# Altium PCB BatteryManagementSystem2.PcbDoc (part 1 of 2)
Units mil, origin at the board's own origin, x right, y up, seen from the top; angles counter-clockwise.
Board outline 5250 x 2500 mil, 4 copper layers (Top Layer, GND, 3V3, Bottom Layer); 230 components, 167 nets, 719 pads, 227 vias.
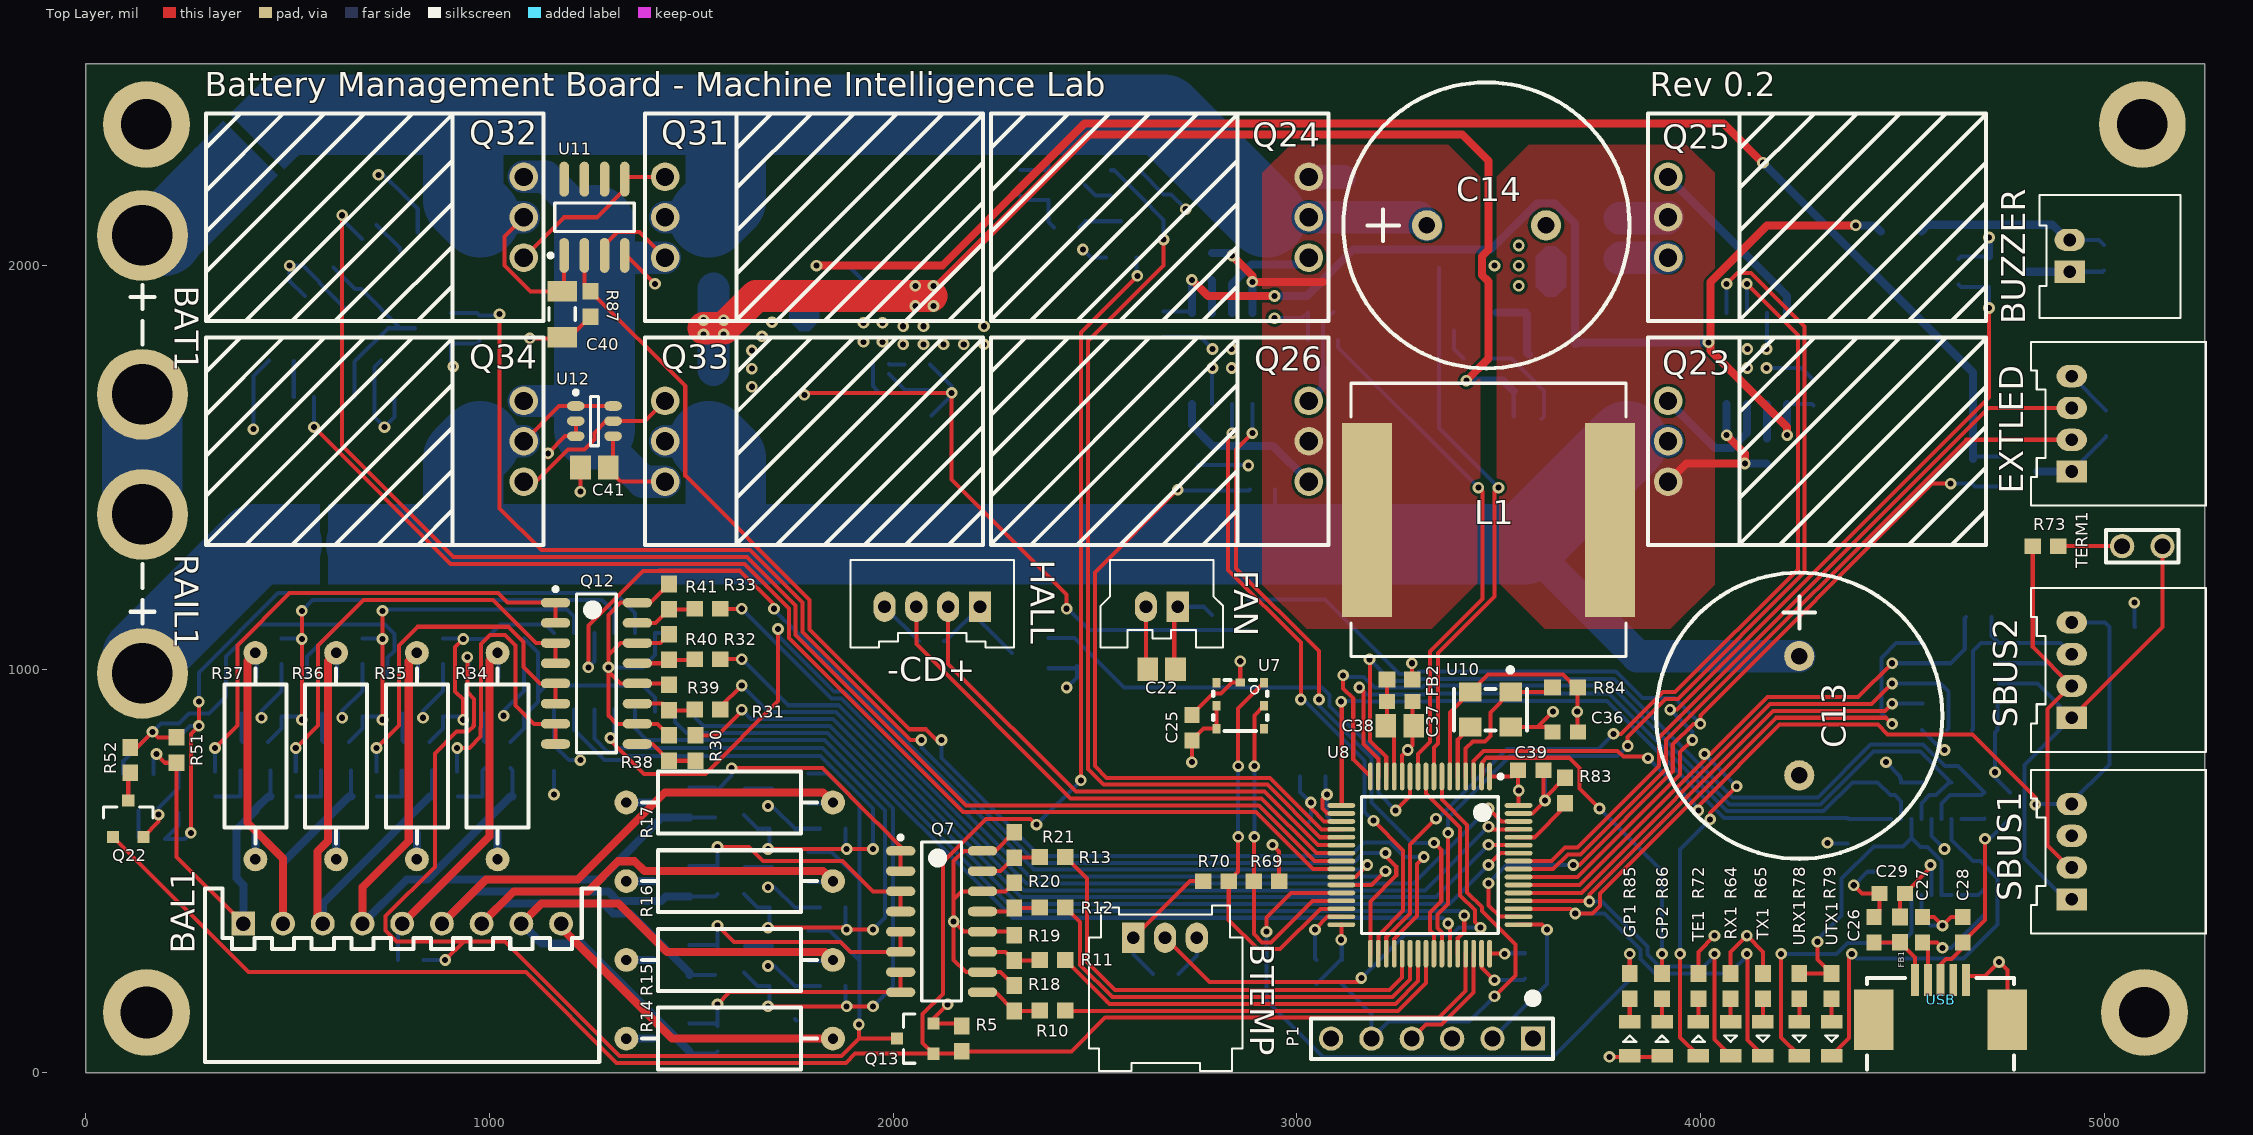
[diagram p0: Top Layer view]
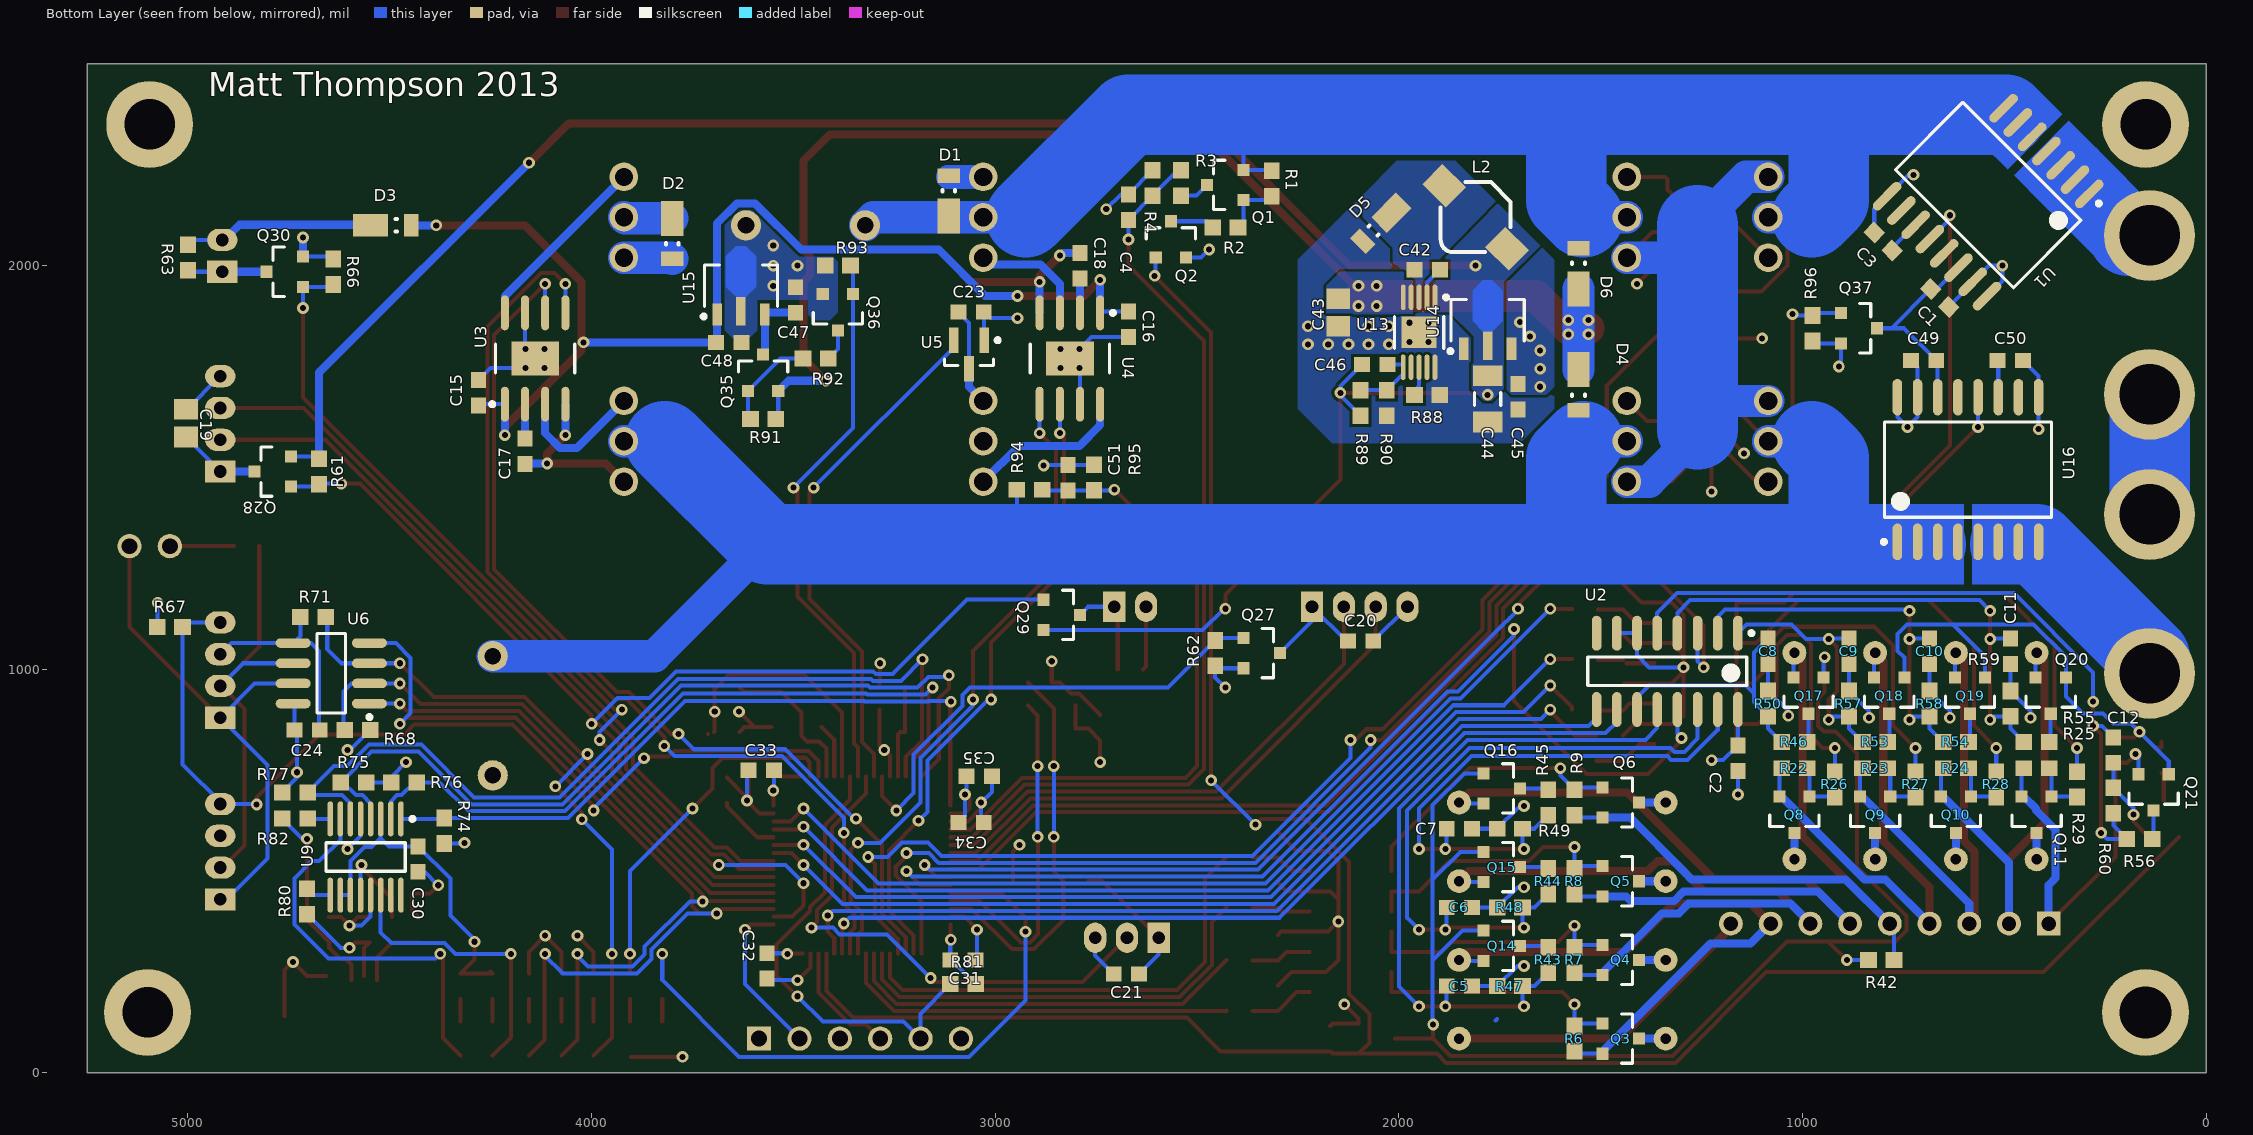
[diagram p1: Bottom Layer view, seen from below]
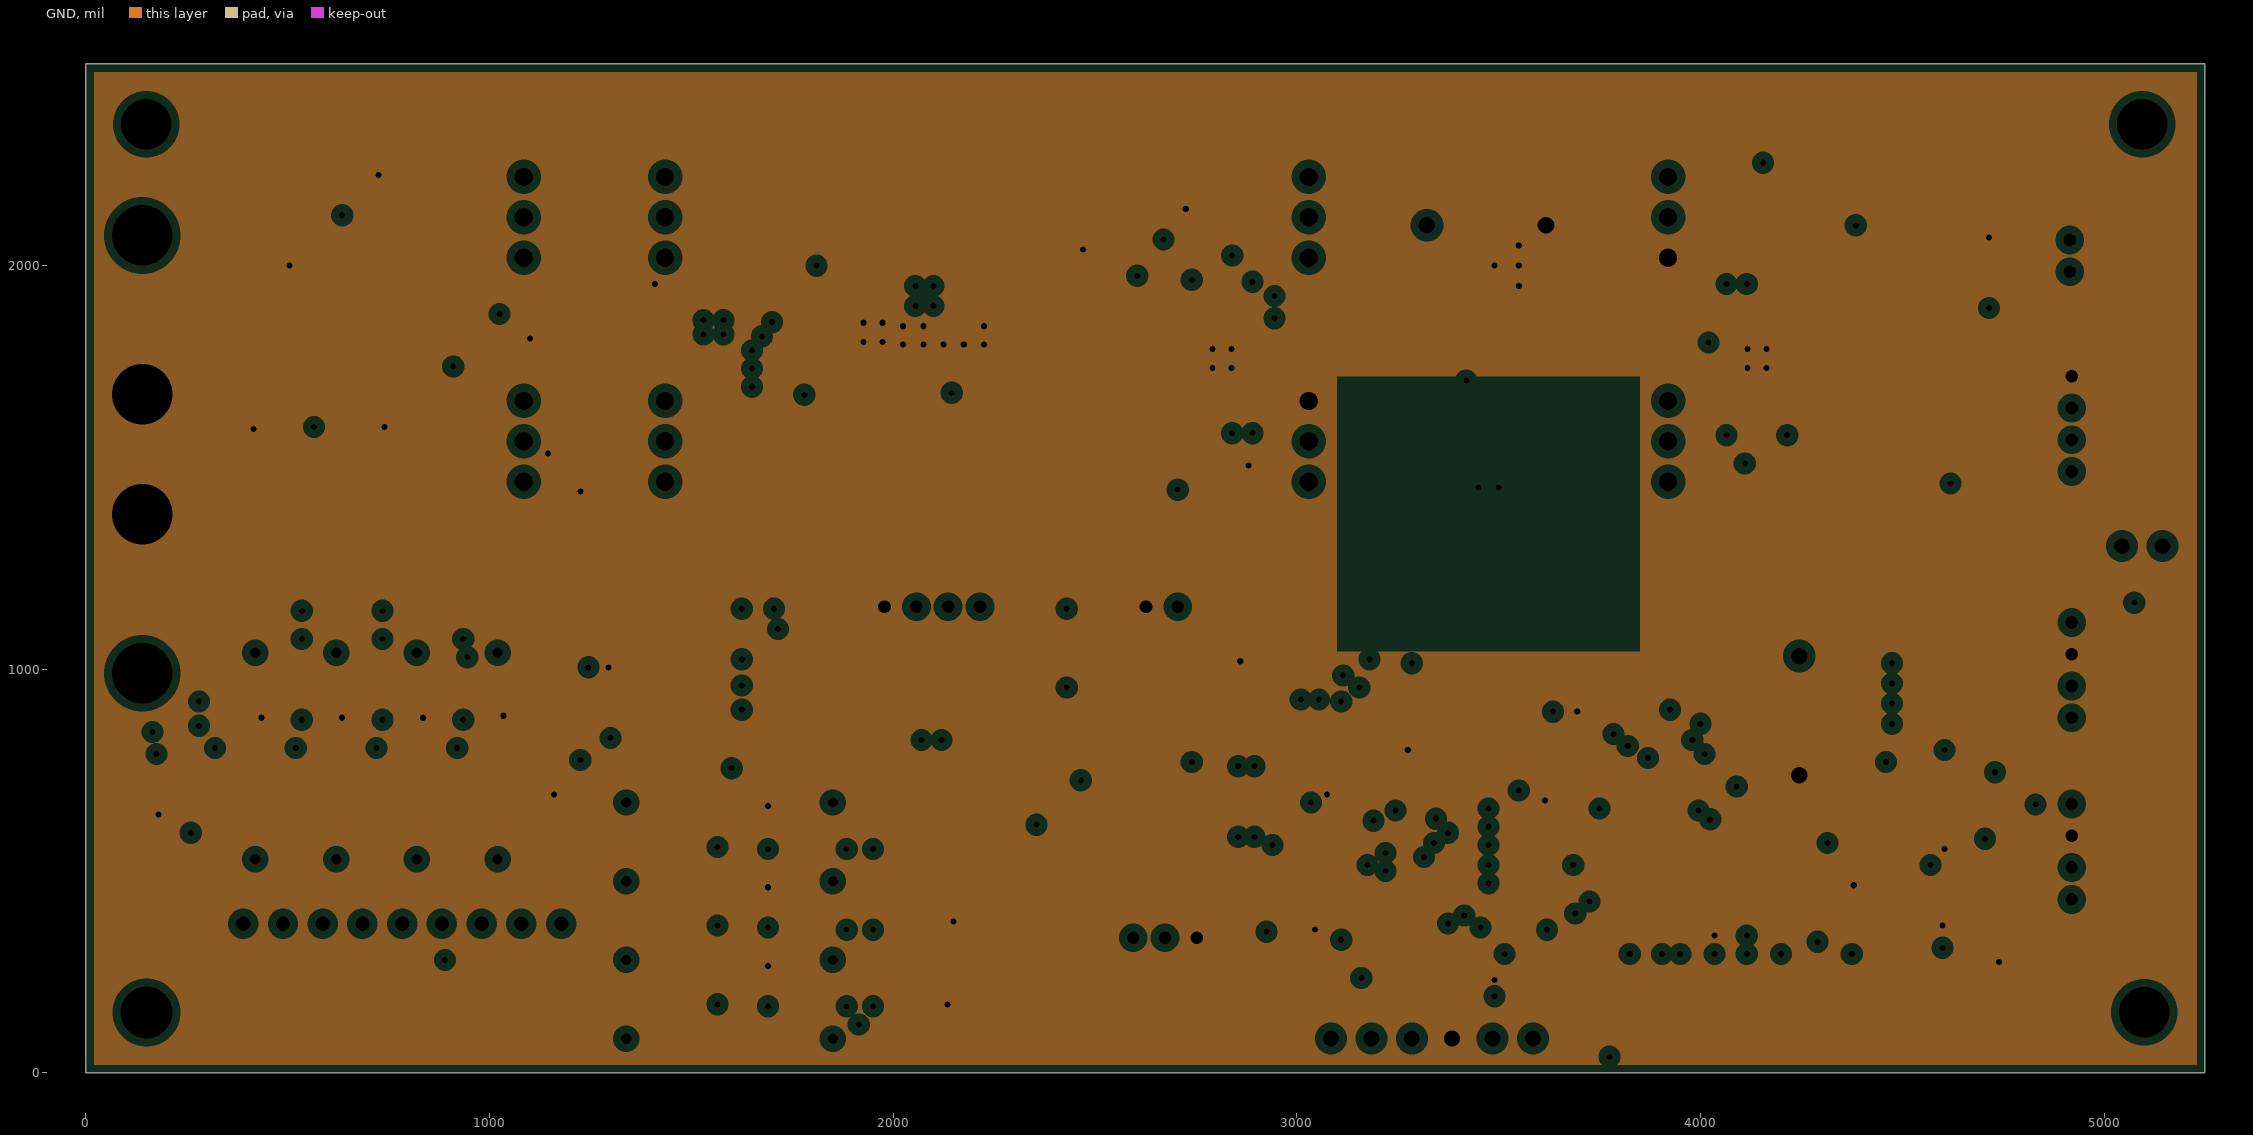
[diagram p2: GND, clearances drawn from the general rule]
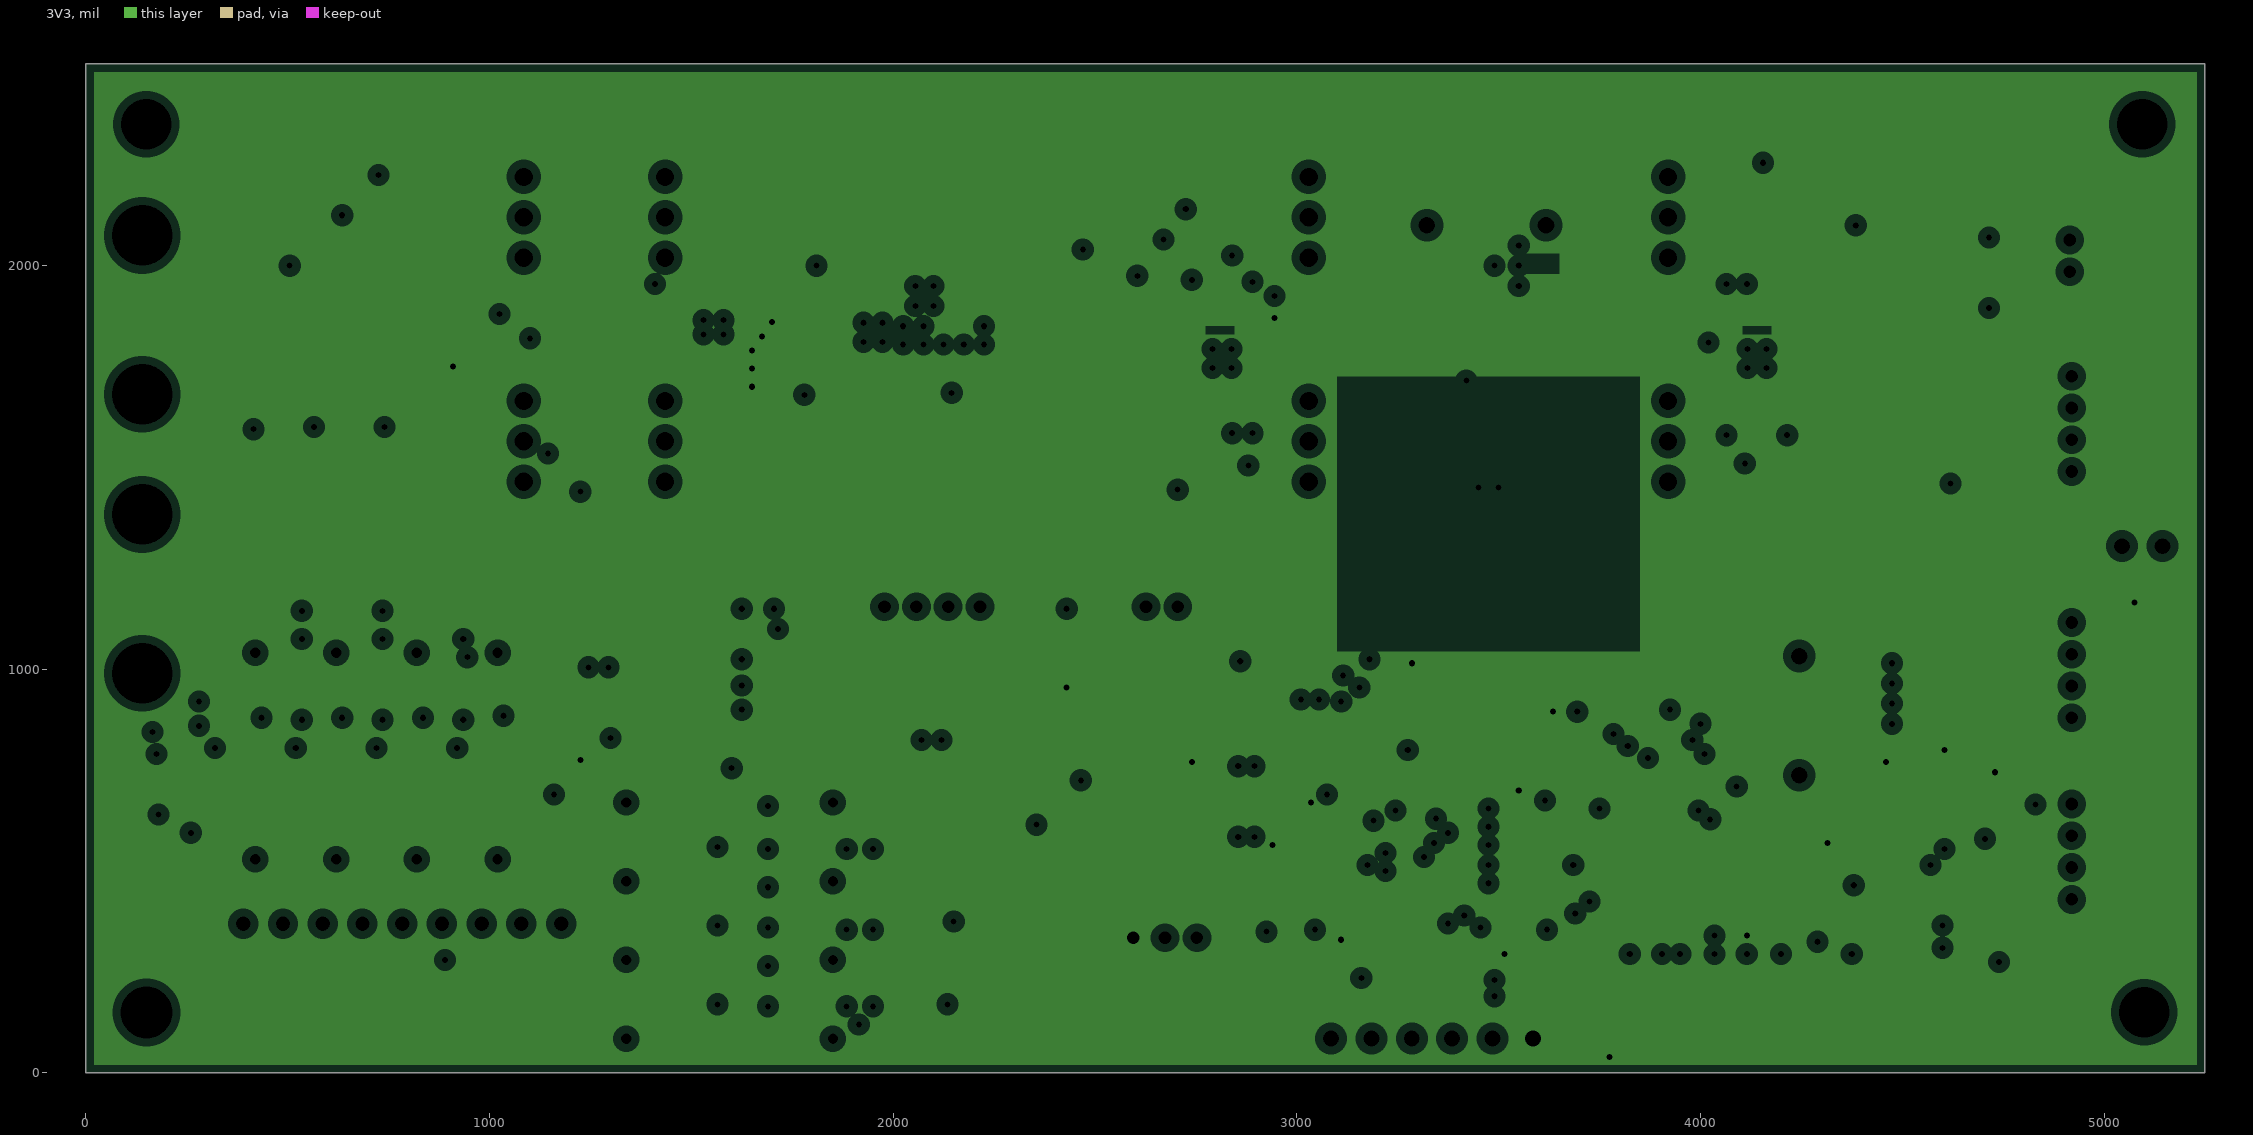
[diagram p3: 3V3, clearances drawn from the general rule]

## Layer stack, top to bottom
Top Layer: signal copper 1.4
Dielectric: core 12.6, FR-4, Dk 4.8
GND: plane copper 1.4, net GND
Dielectric: prepreg 12.6, FR-4, Dk 4.8
3V3: plane copper 1.4, net 3V3
Dielectric: core 12.6, FR-4, Dk 4.8
Bottom Layer: signal copper 1.4

## Board outline
0,0 0,2500 5250,2500 5250,0

## Design rules (kind name [scope] priority, off if disabled: settings)
Clearance InnerClearance [OnLayer('GND') OR OnLayer('3V3')] p1: gap=10
Clearance [All] p2: gap=7
HoleSize [All] p1: absolutevalues=TRUE maxlimit=200 minlimit=15 maxpercent=80.000 minpercent=20.000
MinimumAnnularRing [All] p1: minimumring=7
MinimumSolderMaskSliver NoSliverOnPads [IsPad OR (IsVia AND HasFootprint('*')) OR OnLayer('Bottom Solder') OR OnLayer('Top Solder') vs IsPad OR (IsVia AND HasFootprint('*')) OR OnLayer('Bottom Solder') OR OnLayer('Top Solder')] p1: minsoldermaskwidth=0
MinimumSolderMaskSliver [All] p2: minsoldermaskwidth=6
PlaneClearance [All] p1: clearance=20
PlaneConnect [All] p1: planeconnectstyle=Direct reliefexpansion=20 reliefentries=4 reliefconductorwidth=10 reliefairgap=10
PolygonConnect [All] p1: connectstyle=Direct reliefconductorwidth=10 reliefentries=4 polygonreliefangle="90 Angle" airgapwidth=10
RoutingVias [All] p1: holewidth=7 width=29 viastyle="Through Hole" minholewidth=7 minwidth=29 maxholewidth=28 maxwidth=50
SilkToSolderMaskClearance SilkscreenOverComponentPads [IsPad] p1: minsilkscreentomaskgap=10 clearancetoexposedcopper=TRUE
SolderMaskExpansion BlobMaskExpansion [InNetClass('Blob') AND IsTrack] p1: expansion=-25
SolderMaskExpansion [All] p2: expansion=4
Width BlobWidth [InNetClass('Blob')] p1: maxlimit=200 minlimit=10 preferedwidth=10
Width [All] p2: maxlimit=100 minlimit=10 preferedwidth=10
23 further rules are at their usual default settings.

## Classes and differential pairs
component class Top: Q37 R96
component class U_Battery: BAL1 BAT1 C1 C2 C3 C4 C5 C6 C7 C8 C9 C10 C11 C12 Q1 Q2 Q3 Q4 Q5 Q6 Q7 Q8 Q9 Q10 Q11 Q12 Q13 Q14 Q15 Q16 Q17 Q18 Q19 Q20 Q21 Q22 R1 R2 R3 R4 R5 R6 R7 R8 R9 R10 R11 R12 R13 R14 R15 R16 R17 R18 R19 R20 R21 R22 R23 R24 R25 R26 R27 R28 R29 R30 R31 R32 R33 R34 R35 R36 R37 R38 R39 R40 R41 R42 R43 R44 R45 R46 R47 R48 R49 R50 R51 R52 R53 R54 R55 R56 R57 R58 R59 R60 U1 U2
component class U_Charge: C13 C14 C15 C16 C17 C18 D1 D2 L1 Q23 Q24 Q25 Q26 U3 U4
component class U_CPU: BTEMP BUZZER C19 C20 C21 C22 C23 C24 C25 C26 C27 C28 C29 C30 C31 C32 C33 C34 C35 C36 C37 C38 C39 D3 EXTLED FAN FB1 FB2 GP1 GP2 HALL P1 Q27 Q28 Q29 Q30 R61 R62 R63 R64 R65 R66 R67 R68 R69 R70 R71 R72 R73 R74 R75 R76 R77 R78 R79 R80 R81 R82 R83 R84 R85 R86 RX1 SBUS1 SBUS2 TE1 TERM1 TX1 U5 U6 U7 U8 U9 U10 URX1 USB UTX UTX1
component class U_Discharge: C40 C41 Q31 Q32 Q33 Q34 R87 U11 U12
component class U_Power: C42 C43 C44 C45 C46 C47 C48 D4 D5 D6 L2 Q35 Q36 R88 R89 R90 R91 R92 R93 U13 U14 U15
component class U_Rail: C49 C50 C51 R94 R95 RAIL1 U16
net class BAL[8..1]: BAL1 BAL2 BAL3 BAL4 BAL5 BAL6 BAL7 BAL8
net class Blob: BAT+ GND NetBAT1_+ NetC41_2 NetRAIL1_+ RAIL+

## Components (designator, comment, footprint, x,y, rotation, side; value= is the part's Value field where it differs from the comment)
BAL1 "JST1x9" JST1X9 390,370 r0 top
BAT1 "BATWIRE" BATWIRE12 140,2075 r270 top
BTEMP "3pos RA sherlock connector" MOLEX-HDR-1X3-SHERLOCK-RA 2595,335 r180 top
BUZZER "2-pin Horz Sherlock" MOLEX-HDR-1X2-SHERLOCK-HORZ 4915,1985 r270 top
C1 "Cap" CAPC0603 660,1920 r225 bottom
C2 "Cap" CAPC0603 1160,780 r270 bottom
C3 "Cap" CAPC0603 800,2060 r45 bottom
C4 "Cap" CAPC0603 2670,2145 r90 bottom
C5 "Cap" CAPC0603 1850,215 r180 bottom
C6 "Cap" CAPC0603 1850,410 r180 bottom
C7 "Cap" CAPC0603 1850,605 r180 bottom
C8 "Cap" CAPC0603 1085,1045 r270 bottom
C9 "Cap" CAPC0603 885,1045 r270 bottom
C10 "Cap" CAPC0603 685,1045 r270 bottom
C11 "Cap" CAPC0603 485,1045 r270 bottom
C12 "Cap" CAPC0603 230,800 r270 bottom
C13 "CapPol" CAP1000UF 4245,885 r270 top
C14 "CapPol" CAP1000UF 3470,2100 r0 top
C15 "Cap" CAPC0603 4280,1685 r90 bottom
C16 "Cap" CAPC0603 2670,1855 r270 bottom
C17 "Cap" CAPC0603 4165,1540 r90 bottom
C18 "Cap" CAPC0603 2790,2000 r270 bottom
C19 "Cap" CAPC0805 5005,1610 r90 bottom
C20 "Cap" CAPC0603 2095,1070 r180 bottom
C21 "Cap" CAPC0603 2675,245 r180 bottom
C22 "Cap" CAPC0805 2665,1000 r180 top
C23 "Cap" CAPC0603 3060,1885 r180 bottom
C24 "Cap" CAPC0603 4705,850 r0 bottom
C25 "Cap" CAPC0603 2740,855 r90 top
C26 "Cap" CAPC0603 4430,355 r90 top
C27 "Cap" CAPC0603 4550,355 r90 top
C28 "Cap" CAPC0603 4650,355 r90 top
C29 "Cap" CAPC0603 4475,445 r180 top
C30 "Cap" CAPC0603 4430,530 r270 bottom
C31 "Cap" CAPC0603 3080,280 r180 bottom
C32 "Cap" CAPC0603 3565,265 r270 bottom
C33 "Cap" CAPC0603 3580,750 r0 bottom
C34 "Cap" CAPC0603 3060,620 r0 bottom
C35 "Cap" CAPC0603 3040,735 r0 bottom
C36 "Cap" CAPC0603 3665,845 r0 top
C37 "Cap" CAPC0603 3255,920 r0 top
C38 "Cap" CAPC0805 3255,860 r0 top
C39 "Cap" CAPC0603 3580,750 r0 top
C40 "Cap" CAPC1206 1180,1880 r90 top
C41 "Cap" CAPC0805 1260,1500 r0 top
C42 "Cap" CAPC0603 1930,1990 r0 bottom
C43 "Cap" CAPC0805 2150,1884 r270 bottom
C44 "Cap" CAPC1206 1780,1670 r270 bottom
C45 "Cap" CAPC0603 1705,1675 r270 bottom
C46 "Cap" CAPC0603 2060,1755 r0 bottom
C47 "Cap" CAPC0603 3495,1915 r90 bottom
C48 "Cap" CAPC0603 3660,1810 r180 bottom
C49 "Cap" CAPC0603 700,1765 r0 bottom
C50 "Cap" CAPC0603 485,1765 r180 bottom
C51 "Cap" CAPC0603 2820,1475 r90 bottom
D1 "DFLS160" POWERDI123 3115,2160 r90 bottom
D2 "DFLS160" POWERDI123 3800,2080 r270 bottom
D3 "DFLS160" POWERDI123 4510,2100 r180 bottom
D4 "DFLS160" POWERDI123 1555,1705 r270 bottom
D5 "DFLS160" POWERDI123 2045,2105 r315 bottom
D6 "DFLS160" POWERDI123 1555,1980 r90 bottom
EXTLED "MOLEX-HDR-1x4-SHERLOCK_RA" MOLEX-HDR-1X4-SHERLOCK-RA 4920,1490 r270 top
FAN "2-pin Vert Sherlock" MOLEX-HDR-1X2-SHERLOCK-VERT 2705,1155 r0 top
FB1 "FBead" RES0603 4495,355 r270 top
FB2 "FBead" RES0603 3255,975 r0 top
GP1 "LED" LED0805 3825,85 r90 top
GP2 "LED" LED0805 3905,85 r90 top
HALL "MOLEX-HDR-1x4-SHERLOCK_VERT" MOLEX-HDR-1X4-SHERLOCK-VERT 2215,1155 r0 top
L1 "Inductor" IHLP-6767 3475,1370 r180 top
L2 "Inductor" CDPH4D19F 1810,2120 r180 bottom
P1 "SWD" SWD_STM32 3585,85 r270 top
Q1 "FDN5618P" POWERSOT-3 2430,2200 r0 bottom
Q2 "FDN5630" POWERSOT-3 2565,2065 r90 bottom
Q3 "FDN5618P" POWERSOT-3 1450,85 r180 bottom
Q4 "FDN5618P" POWERSOT-3 1450,280 r180 bottom
Q5 "FDN5618P" POWERSOT-3 1450,475 r180 bottom
Q6 "FDN5618P" POWERSOT-3 1450,670 r180 bottom
Q7 "MMPQ2222A" MMPQ2222A 2120,375 r0 top
Q8 "FDN5618P" POWERSOT-3 1020,640 r270 bottom
Q9 "FDN5618P" POWERSOT-3 820,640 r270 bottom
Q10 "FDN5618P" POWERSOT-3 620,640 r270 bottom
Q11 "FDN5618P" POWERSOT-3 420,640 r270 bottom
Q12 "MMPQ2222A" MMPQ2222A 1265,990 r0 top
Q13 "FDN5630" POWERSOT-3 2055,85 r180 top
Q14 "FDN5618P" POWERSOT-3 1745,315 r180 bottom
Q15 "FDN5618P" POWERSOT-3 1745,510 r180 bottom
Q16 "FDN5618P" POWERSOT-3 1745,705 r180 bottom
Q17 "FDN5618P" POWERSOT-3 985,935 r270 bottom
Q18 "FDN5618P" POWERSOT-3 785,935 r270 bottom
Q19 "FDN5618P" POWERSOT-3 585,935 r270 bottom
Q20 "FDN5618P" POWERSOT-3 385,935 r270 bottom
Q21 "FDN5618P" POWERSOT-3 130,695 r270 bottom
Q22 "FDN5630" POWERSOT-3 105,630 r90 top
Q23 "IRFB3306PbF" "TO-220AB HEATSINK" 3920,1565 r270 top
Q24 "IRFB3306PbF" "TO-220AB HEATSINK" 3030,2120 r90 top
Q25 "IRFB3306PbF" "TO-220AB HEATSINK" 3920,2120 r270 top
Q26 "IRFB3306PbF" "TO-220AB HEATSINK" 3030,1565 r90 top
Q27 "FDN5618P" PowerSOT-3 2340,1040 r180 bottom
Q28 "FDN5618P" PowerSOT-3 4790,1490 r0 bottom
Q29 "FDN5618P" PowerSOT-3 2835,1135 r180 bottom
Q30 "FDN5630" PowerSOT-3 4760,1985 r0 bottom
Q31 "IRFB3306PbF" "TO-220AB Heatsink" 1435,2120 r270 top
Q32 "IRFB3306PbF" "TO-220AB Heatsink" 1085,2120 r90 top
Q33 "IRFB3306PbF" "TO-220AB HEATSINK" 1435,1565 r270 top
Q34 "IRFB3306PbF" "TO-220AB HEATSINK" 1085,1565 r90 top
Q35 "FDN5618P" PowerSOT-3 3575,1735 r90 bottom
Q36 "FDN5630" POWERSOT-3 3390,1885 r270 bottom
Q37 "FDN5618P" PowerSOT-3 860,1845 r180 bottom
R1 "Res" RES0603 2315,2203.5 r270 bottom
R2 "Res" RES0603 2430,2095 r0 bottom
R3 "Res" RES0603 2540,2205 r90 bottom
R4 "Res" RES0603 2610,2205 r90 bottom
R5 "Res" RES0603 2170,85 r90 top
R6 "Res" RES0603 1565,85 r90 bottom
R7 "Res" RES0603 1565,280 r90 bottom
R8 "Res" RES0603 1565,475 r90 bottom
R9 "Res" RES0603 1565,670 r90 bottom
R10 "Res" RES0603 2395,155 r180 top
R11 "Res" RES0603 2395,280 r180 top
R12 "Res" RES0603 2395,410 r180 top
R13 "Res" RES0603 2395,535 r180 top
R14 "Res" FMP200 1595,85 r0 top
R15 "Res" FMP200 1595,280 r0 top
R16 "Res" FMP200 1595,475 r0 top
R17 "Res" FMP200 1595,670 r0 top
R18 "Res" RES0603 2300,185 r90 top
R19 "Res" RES0603 2300,310 r90 top
R20 "Res" RES0603 2300,440 r90 top
R21 "Res" RES0603 2300,565 r90 top
R22 "Res" RES0603 1020,755 r180 bottom
R23 "Res" RES0603 820,755 r180 bottom
R24 "Res" RES0603 620,755 r180 bottom
R25 "Res" RES0603 420,755 r180 bottom
R26 "Res" RES0603 920,715 r90 bottom
R27 "Res" RES0603 720,715 r90 bottom
R28 "Res" RES0603 520,715 r90 bottom
R29 "Res" RES0603 320,715 r90 bottom
R30 "Res" RES0603 1510,805 r270 top
R31 "Res" RES0603 1540,900 r180 top
R32 "Res" RES0603 1540,1025 r180 top
R33 "Res" RES0603 1540,1150 r180 top
R34 "Res" FMP200 1020,785 r90 top
R35 "Res" FMP200 820,785 r90 top
R36 "Res" FMP200 620,785 r90 top
R37 "Res" FMP200 420,785 r90 top
R38 "Res" RES0603 1445,805 r90 top
R39 "Res" RES0603 1445,930 r90 top
R40 "Res" RES0603 1445,1055 r90 top
R41 "Res" RES0603 1445,1180 r90 top
R42 "Res" RES0603 805,280 r0 bottom
R43 "Res" RES0603 1630,280 r270 bottom
R44 "Res" RES0603 1630,475 r270 bottom
R45 "Res" RES0603 1630,670 r270 bottom
R46 "Res" RES0603 1020,820 r0 bottom
R47 "Res" RES0603 1725,215 r0 bottom
R48 "Res" RES0603 1725,410 r0 bottom
R49 "Res" RES0603 1725,605 r0 bottom
R50 "Res" RES0603 1085,915 r90 bottom
R51 "Res" RES0603 225,800 r90 top
R52 "Res" RES0603 110,775 r270 top
R53 "Res" RES0603 820,820 r0 bottom
R54 "Res" RES0603 620,820 r0 bottom
R55 "Res" RES0603 420,820 r0 bottom
R56 "Res" RES0603 165,580 r0 bottom
R57 "Res" RES0603 885,915 r90 bottom
R58 "Res" RES0603 685,915 r90 bottom
R59 "Res" RES0603 485,915 r90 bottom
R60 "Res" RES0603 230,675 r90 bottom
R61 "Res" RES0603 4675,1490 r270 bottom
R62 "Res" RES0603 2455,1040 r90 bottom
R63 "Res" RES0603 5000,2020 r270 bottom
R64 "Res" RES0603 4075,215 r270 top
R65 "Res" RES0603 4155,215 r270 top
R66 "Res" RES0603 4640,1985 r90 bottom
R67 "Res" RES0603 5045,1105 r180 bottom
R68 "Res" RES0603 4580,850 r0 bottom
R69 "Res" RES0603 2925,475 r180 top
R70 "Res" RES0603 2800,475 r0 top
R71 "Res" RES0603 4690,1130 r0 bottom
R72 "Res" RES0603 3995,215 r90 top
R73 "Res" RES0603 4855,1305 r180 top
R74 "Res" RES0603 4365,600 r90 bottom
R75 "Res" RES0603 4590,720 r0 bottom
R76 "Res" RES0603 4465,720 r180 bottom
R77 "Res" RES0603 4735,695 r180 bottom
R78 "Res" RES0603 4245,215 r270 top
R79 "Res" RES0603 4325,215 r270 top
R80 "Res" RES0603 4705,425 r90 bottom
R81 "Res" RES0603 3080,220 r0 bottom
R82 "Res" RES0603 4735,630 r180 bottom
R83 "Res" RES0603 3665,700 r90 top
R84 "Res" RES0603 3665,955 r180 top
R85 "Res" RES0603 3825,215 r90 top
R86 "Res" RES0603 3905,215 r90 top
R87 "Res" RES0603 1250,1905 r270 top
R88 "Res" RES0603 1930,1680 r180 bottom
R89 "Res" RES0603 2095,1660 r90 bottom
R90 "Res" RES0603 2030,1660 r270 bottom
R91 "Res" RES0603 3575,1620 r180 bottom
R92 "Res" RES0603 3445,1770 r0 bottom
R93 "Res" RES0603 3390,2000 r0 bottom
R94 "Res" RES0603 2915,1445 r180 bottom
R95 "Res" RES0603 2755,1475 r90 bottom
R96 "Res" RES0603 975,1845 r90 bottom
RAIL1 "BATWIRE" BATWIRE12 140,990 r90 top
RX1 "LED" LED0805 4075,85 r270 top
SBUS1 "MOLEX-HDR-1x4-SHERLOCK_RA" MOLEX-HDR-1X4-SHERLOCK-RA 4920,430 r270 top
SBUS2 "MOLEX-HDR-1x4-SHERLOCK_RA" MOLEX-HDR-1X4-SHERLOCK-RA 4920,880 r270 top
TE1 "LED" LED0805 3995,85 r90 top
TERM1 "Jumper" HEADER_MALE_1X2 5045,1305 r0 top
TX1 "LED" LED0805 4155,85 r270 top
U1 "ACS710" ACS710_NOPIN 540,2175 r315 bottom
U2 "SN74LV4052A" SN74LV4052AD 1335,995 r270 bottom
U3 "UCC27201A" UCC27201A 4140,1770 r90 bottom
U4 "UCC27201A" UCC27201A 2815,1770 r270 bottom
U5 "MCP9701" MCP970X-E/TT 3065,1780 r270 bottom
U6 "ISL83485" ISL8348XIBZ 4645,990 r0 bottom
U7 "BMP180" BMP180 2860,910 r0 top
U8 "STM32F103RET6" STM32F103RXTX 3330,515 r270 top
U9 "FT230XS" FT230XS 4560,535 r270 bottom
U10 "636L3C008M" 636L3C 3480,900 r180 top
U11 "MIC5011" MIC5011 1260,2120 r90 top
U12 "LM5050-1" LM5050 1260,1615 r0 top
U13 "LT3991" LTS3991MSE 1950,1835 r270 bottom
U14 "MCP1703AT" MCP1703AT-xx02EMB 1780,1865 r90 bottom
U15 "L78L15AC" L78LXXAXUTR 3630,1950 r90 bottom
U16 "ACS710" ACS710 590,1495 r90 bottom
URX1 "LED" LED0805 4245,85 r270 top
USB "UX60SC-MB-5ST" UX60SC-MB-5ST 4595,230 r0 top
UTX1 "LED" LED0805 4325,85 r270 top

## Footprints (in the part's own frame and the unit in brackets; to place one, negate y for a bottom-side part, rotate by r counter-clockwise, add the part's x,y. Pads: shape width x height; smd on the part's side, far side on the other; paste and mask are expansions set on the pad)
636L3C [mm]
  rect 1.4x1.2 smd: 1(-1.27,-1.1) 2(1.27,-1.1) 3(1.27,1.1) 4(-1.27,1.1)
  silkscreen extent -2.3,-2.65 2.3,1.3, body extent -2.5,-1.6 2.5,1.6, height 2
ACS710 [mm] "SOIC, 16-Leads, Body 10.5x7.6mm (max), Pitch 1.27mm, IPC Medium Density"
  oval 2.3x0.6 smd: 1(-4.55,4.445) 2(-4.55,3.175) 3(-4.55,1.905) 4(-4.55,0.635) 5(-4.55,-0.635) 6(-4.55,-1.905) 7(-4.55,-3.175) 8(-4.55,-4.445) 9(4.55,-4.445) 10(4.55,-3.175) 11(4.55,-1.905) 12(4.55,-0.635) 13(4.55,0.635) 14(4.55,1.905) 15(4.55,3.175) 16(4.55,4.445)
  silkscreen extent -4.67,-5.25 3,5.42, body extent -3.8,-5.25 3.8,5.25, height 2.65
ACS710_NOPIN [mm] "Hacked footprint to make battery board look nice."
  oval 2.3x0.6 smd: 1(-4.55,4.445) 2(-4.55,3.175) 3(-4.55,1.905) 4(-4.55,0.635) 5(-4.55,-0.635) 6(-4.55,-1.905) 7(-4.55,-3.175) 8(-4.55,-3.175) 9(4.55,-4.445) 10(4.55,-3.175) 11(4.55,-1.905) 12(4.55,-0.635) 13(4.55,0.635) 14(4.55,1.905) 15(4.55,3.175) 16(4.55,4.445)
  silkscreen extent -4.67,-5.25 3,5.42, body extent -3.8,-5.25 3.8,5.25, height 2.65
BATWIRE12 [mm] "Two 12AWG wires soldered directly to the board"
  round 5.715 hole 3.81: +(0,0) -(10,0)
  silkscreen extent 3.13,-0.75 6.87,0.75
BMP180 [mm]
  rect 0.5x0.6 smd: 1(-1.5,1.45) 2(-1.5,0) 3(-1.5,-1.45) 4(1.5,-1.45) 5(1.5,0) 6(1.5,1.45)
  rect 0.6x0.5 smd: 7(0,1.45)
  silkscreen extent -1.7,-1.6 1.7,1.6, body extent -1.9,-1.8 1.9,1.8, height 2
CAP1000UF [mm] "CAP ALUM 1000UF 50V 20% RADIAL"
  round 1.9 hole 1.05: 1(-3.75,0) 2(3.75,0)
  silkscreen extent -9,-9 9,9, body extent -8.93,-8.98 9,8.98, height 20
CAPC0603 [mm] "Chip Capacitor, 2-Leads, Body 1.60x0.80mm, IPC Medium Density"
  rect 1x0.95 smd: 1(-0.8,0) 2(0.8,0)
  body extent -0.88,-0.48 0.87,0.48, height 0.8
CAPC0805 [mm] "Chip Capacitor, 2-Leads, Body 2.01x1.25mm, IPC Medium Density"
  rect 1.3x1.5 smd: 1(-0.875,0) 2(0.875,0)
  body extent -1.1,-0.72 1.11,0.72, height 1.8
CAPC1206 [mm] "Chip Capacitor, 2-Leads, Body 3.20x1.60mm, IPC Medium Density"
  rect 1.3x1.85 smd: 1(-1.45,0) 2(1.45,0)
  silkscreen extent -0.4,-0.82 0.4,0.82, body extent -1.7,-0.9 1.7,0.9, height 1.8
CDPH4D19F [mm] "SMD Power Inductor"
  rect 1.8x2.1 smd rot 45: 1(-1.98,1.98) 2(1.98,-1.98)
  silkscreen extent -2.19,-2.19 2.21,2.21, body extent -2.45,-2.45 2.45,2.45, height 2
FMP200 [mm] "Power resistor Yageo 2W"
  round 1.5 hole 0.65: 1(-6.5,0) 2(6.5,0)
  silkscreen extent -5.5,-1.95 5.5,1.95, body extent -4.5,-1.93 4.5,1.95, height 3.9
FT230XS [mm] "SOP, 16-Leads, Body 4.90x3.90mm, Pitch 0.64mm, IPC Medium Density"
  oval 2.2x0.35 smd: 1(-2.4,2.223) 2(-2.4,1.588) 3(-2.4,0.953) 4(-2.4,0.318) 5(-2.4,-0.317) 6(-2.4,-0.952) 7(-2.4,-1.587) 8(-2.4,-2.222) 9(2.4,-2.223) 10(2.4,-1.588) 11(2.4,-0.953) 12(2.4,-0.318) 13(2.4,0.317) 14(2.4,0.952) 15(2.4,1.587) 16(2.4,2.222)
  silkscreen extent -2.52,-2.5 0.9,3.07, body extent -2,-2.5 2,2.5, height 1.76
HEADER_MALE_1X2 [mil]
  round 60 hole 39.37: 1(0,0) 2(100,0)
  silkscreen extent -40,-40 140,40
IHLP-6767 [mm] "Low profile, high current IHLP inductor"
  rect 3.125x12.19 smd: 1(-7.648,0) 2(7.648,0)
  silkscreen extent -8.65,-8.6 8.65,8.6, body extent -8.64,-8.58 8.64,8.57, height 7
ISL8348XIBZ [mm] "SOIC, 8-Leads, Body 4.90x3.90mm, Pitch 1.27mm, IPC Medium Density"
  oval 2.2x0.6 smd: 1(-2.4,1.905) 2(-2.4,0.635) 3(-2.4,-0.635) 4(-2.4,-1.905) 5(2.4,-1.905) 6(2.4,-0.635) 7(2.4,0.635) 8(2.4,1.905)
  silkscreen extent -2.52,-2.5 0.9,2.88, body extent -2,-2.5 2,2.5, height 1.75
JST1X9 [mm]
  rect 1.5x1.5 hole 0.9: 1(0,0)
  round 1.5 hole 0.9: 2(2.5,0) 3(5,0) 4(7.5,0) 5(10,0) 6(12.5,0) 7(15,0) 8(17.5,0) 9(20,0)
  silkscreen extent -2.4,-8.7 22.4,2.2, body extent -2.45,-9.23 22.45,2.3, height 6.17
L78LXXAXUTR [mm] "SOT89, 3-Leads, Body 4.50x2.45mm, Pitch 1.50mm, Lead Span 4.1mm, IPC Medium Density"
  rect 1.4x0.6 smd: 1(-1.8,1.5) 3(-1.8,-1.5)
  rect 1.8x0.6 smd: 2(-1.6,0)
  Top Layer region: -0.7,0.3 -0.05,0.95 1.85,0.95 2.5,0.3 2.5,-0.3 1.85,-0.95 -0.05,-0.95 -0.7,-0.3
  silkscreen extent -2.05,-2.3 1.32,2.48, body extent -1.28,-2.3 1.32,2.3, height 1.6
LED0805 [mm] "Chip LED, 2-Leads, Body 2.00x1.25mm, IPC Medium Density"
  rect 0.85x1.35 smd: A(-1.075,0) C(1.075,0)
  silkscreen extent -0.2,-0.4 0.2,0.4, body extent -1,-0.63 1,0.63, height 0.75
LM5050 [mm] "SOT23, 6-Leads, Body 2.90x2.80mm, Pitch 0.95mm, IPC Medium Density"
  oval 1.1x0.6 smd: 1(-1.175,0.95) 2(-1.175,0) 3(-1.175,-0.95) 4(1.175,-0.95) 5(1.175,0) 6(1.175,0.95)
  silkscreen extent -1.3,-1.55 0.25,1.92, body extent -0.87,-1.52 0.88,1.53, height 1.1
LTS3991MSE [mm] "TSSOP, 10-Leads, Body 3.1x3.1mm (max), Pitch 0.50mm, IPC Medium Density"
  oval 1.6x0.3 smd: 1(-2.2,1) 2(-2.2,0.5) 3(-2.2,0) 4(-2.2,-0.5) 5(-2.2,-1) 6(2.2,-1) 7(2.2,-0.5) 8(2.2,0) 9(2.2,0.5) 10(2.2,1)
  rect 2x2.2 smd: PAD(0,0)
  silkscreen extent -2.32,-1.55 1,1.82, body extent -1.55,-1.55 1.55,1.55, height 1.1
MCP970X-E/TT [mm] "SOT23, 3-Leads, Body 2.86x2.37mm, Pitch 0.95mm, IPC Medium Density"
  rect 1.6x0.6 smd: 1(-0.9,0.95) 2(-0.9,-0.95) 3(0.9,0)
  silkscreen extent -1.02,-1.55 0.7,1.92, body extent -0.7,-1.52 0.7,1.53, height 1.12
MCP1703AT-xx02EMB [mm] "SOT89, 3-Leads, Body 4.49x2.45mm, Pitch 1.50mm, Lead Span 4.1mm, IPC Medium Density"
  rect 1.4x0.6 smd: 1(-1.8,1.5) 3(-1.8,-1.5)
  rect 1.8x0.6 smd: 2(-1.6,0)
  Top Layer region: -0.7,0.3 -0.05,0.95 1.85,0.95 2.5,0.3 2.5,-0.3 1.85,-0.95 -0.05,-0.95 -0.7,-0.3
  silkscreen extent -2.08,-2.3 1.3,2.48, body extent -1.3,-2.3 1.3,2.3, height 1.6
MIC5011 [mm] "SOIC, 8-Leads, Body 4.90x3.90mm, Pitch 1.27mm, IPC Medium Density"
  oval 2.2x0.6 smd: 1(-2.4,1.905) 2(-2.4,0.635) 3(-2.4,-0.635) 4(-2.4,-1.905) 5(2.4,-1.905) 6(2.4,-0.635) 7(2.4,0.635) 8(2.4,1.905)
  silkscreen extent -2.52,-2.5 0.9,2.88, body extent -2,-2.5 2,2.5, height 1.63
MMPQ2222A [mm] "SOIC, 16-Leads, Body 9.90x3.90mm, Pitch 1.27mm, IPC Medium Density"
  oval 1.85x0.6 smd: 1(-2.575,3.175) 1(-2.575,4.445) 3(-2.575,0.635) 3(-2.575,1.905) 5(-2.575,-1.905) 5(-2.575,-0.635) 7(-2.575,-4.445) 7(-2.575,-3.175) 9(2.575,-4.445) 10(2.575,-3.175) 11(2.575,-1.905) 12(2.575,-0.635) 13(2.575,0.635) 14(2.575,1.905) 15(2.575,3.175) 16(2.575,4.445)
  silkscreen extent -2.7,-5 1.25,5.42, body extent -2,-5 2,5, height 1.75
MOLEX-HDR-1X2-SHERLOCK-HORZ [mm]
  rect 1.397x1.905 hole 0.8: 1(0,0)
  oval 1.397x1.905 hole 0.8: 2(-2,0)
  silkscreen extent -4.83,-1.91 2.92,6.98, body extent -4.83,-1.91 2.87,8.59, height 5.54
MOLEX-HDR-1X2-SHERLOCK-VERT [mm]
  rect 1.397x1.905 hole 0.8: 1(0,0)
  oval 1.397x1.905 hole 0.8: 2(-2,0)
  silkscreen extent -4.85,-2.55 2.85,2.95, body extent -4.87,-2.59 2.83,2.96, height 8.5
MOLEX-HDR-1X3-SHERLOCK-RA [mm]
  rect 1.397x1.905 hole 0.8: 1(0,0)
  oval 1.397x1.905 hole 0.8: 2(-2,0) 3(-4,0)
  silkscreen extent -6.86,-2.03 2.79,8.38, body extent -6.88,-1.99 2.82,8.51, height 5.75
MOLEX-HDR-1X4-SHERLOCK-RA [mm]
  rect 1.397x1.905 hole 0.8: 1(0,0)
  oval 1.397x1.905 hole 0.8: 2(-2,0) 3(-4,0) 4(-6,0)
  silkscreen extent -8.15,-2.55 2.15,8.46, body extent -8.17,-1.98 2.13,8.52, height 5.54
MOLEX-HDR-1X4-SHERLOCK-VERT [mm]
  rect 1.397x1.905 hole 0.8: 1(0,0)
  oval 1.397x1.905 hole 0.8: 2(-2,0) 3(-4,0) 4(-6,0)
  silkscreen extent -8.15,-2.55 2.15,2.95, body extent -8.13,-2.57 2.17,2.98, height 8.5
POWERDI123 [mm] "Diodes INC Power Diode"
  rect 0.9x1.4 smd: A(1.6,0)
  rect 2.2x1.4 smd: C(-0.95,0)
  silkscreen extent 0.6,-0.4 0.7,0.4, body extent -1.4,-0.89 1.4,0.89, height 0.98
POWERSOT-3 [mm] "SOT23, 3-Leads, Body 2.92x2.47mm, Pitch 0.95mm, IPC Medium Density"
  rect 0.76x0.76 smd: D(1.145,0) G(-1.145,0.95) S(-1.145,-0.95)
  silkscreen extent 0.04,-1.55 0.74,1.55, body extent -0.74,-1.52 0.74,1.53, height 1.12
PowerSOT-3 [mm] "SOT23, 3-Leads, Body 2.92x2.47mm, Pitch 0.95mm, IPC Medium Density"
  rect 0.76x0.76 smd: D(1.145,0) G(-1.145,0.95) S(-1.145,-0.95)
  silkscreen extent 0.04,-1.55 0.74,1.55, body extent -0.74,-1.52 0.74,1.53, height 1.12
RES0603 [mm] "Chip Resistor, 2-Leads, Body 1.60x0.80mm, IPC Medium Density"
  rect 1.05x1 smd: 1(-0.8,0) 2(0.8,0)
  body extent -0.88,-0.48 0.87,0.47, height 0.8
SN74LV4052AD [mm] "SOIC, 16-Leads, Body 10.0x4.0mm (max), Pitch 1.27mm, IPC Medium Density"
  oval 2.2x0.6 smd mask+0.07: 1(-2.4,4.445) 2(-2.4,3.175) 3(-2.4,1.905) 4(-2.4,0.635) 5(-2.4,-0.635) 6(-2.4,-1.905) 7(-2.4,-3.175) 8(-2.4,-4.445) 9(2.4,-4.445) 10(2.4,-3.175) 11(2.4,-1.905) 12(2.4,-0.635) 13(2.4,0.635) 14(2.4,1.905) 15(2.4,3.175) 16(2.4,4.445)
  silkscreen extent -2.52,-5 0.9,5.42, body extent -2,-5 2,5, height 1.75
STM32F103RXTX [mm] "TSQFP, 64-Leads, Body 12.2x12.2mm (max), Pitch 0.50mm, IPC Medium Density"
  oval 1.75x0.3 smd: 1(-5.575,3.75) 2(-5.575,3.25) 3(-5.575,2.75) 4(-5.575,2.25) 5(-5.575,1.75) 6(-5.575,1.25) 7(-5.575,0.75) 8(-5.575,0.25) 9(-5.575,-0.25) 10(-5.575,-0.75) 11(-5.575,-1.25) 12(-5.575,-1.75) 13(-5.575,-2.25) 14(-5.575,-2.75) 15(-5.575,-3.25) 16(-5.575,-3.75) 33(5.575,-3.75) 34(5.575,-3.25) 35(5.575,-2.75) 36(5.575,-2.25) 37(5.575,-1.75) 38(5.575,-1.25) 39(5.575,-0.75) 40(5.575,-0.25) 41(5.575,0.25) 42(5.575,0.75) 43(5.575,1.25) 44(5.575,1.75) 45(5.575,2.25) 46(5.575,2.75) 47(5.575,3.25) 48(5.575,3.75)
  oval 0.3x1.75 smd: 17(-3.75,-5.575) 18(-3.25,-5.575) 19(-2.75,-5.575) 20(-2.25,-5.575) 21(-1.75,-5.575) 22(-1.25,-5.575) 23(-0.75,-5.575) 24(-0.25,-5.575) 25(0.25,-5.575) 26(0.75,-5.575) 27(1.25,-5.575) 28(1.75,-5.575) 29(2.25,-5.575) 30(2.75,-5.575) 31(3.25,-5.575) 32(3.75,-5.575) 49(3.75,5.575) 50(3.25,5.575) 51(2.75,5.575) 52(2.25,5.575) 53(1.75,5.575) 54(1.25,5.575) 55(0.75,5.575) 56(0.25,5.575) 57(-0.25,5.575) 58(-0.75,5.575) 59(-1.25,5.575) 60(-1.75,5.575) 61(-2.25,5.575) 62(-2.75,5.575) 63(-3.25,5.575) 64(-3.75,5.575)
  silkscreen extent -5.7,-4.3 4.3,4.58, body extent -5,-5 5,5, height 1.6
SWD_STM32 [mil] "SWD connector matching the pinout on STM Discovery Boards"
  rect 60x60 hole 39.37: 1(0,0)
  round 60 hole 39.37: 2(0,-100) 3(0,-200) 4(0,-300) 5(0,-400) 6(0,-500)
  silkscreen extent -110,-550 50,50
"TO-220AB HEATSINK" [mm] "HEXFET Power MOSFET w/ Heat Sink"
  round 1.8 hole 1.15: D(0,0) G(-2.54,0) S(2.54,0)
  silkscreen extent -6.53,-1.25 6.52,20, body extent -6.44,-0.15 6.36,19.9, height 12.7
"TO-220AB Heatsink" [mm] "HEXFET Power MOSFET w/ Heat Sink"
  round 1.8 hole 1.15: D(0,0) G(-2.54,0) S(2.54,0)
  silkscreen extent -6.53,-1.25 6.52,20, body extent -6.44,-0.15 6.36,19.9, height 12.7
UCC27201A [mm] "120-V Boot, 3-A Peak, High Frequency, High-side/Low-side Driver"
  oval 2.2x0.5 smd mask+0.07: 1(-2.875,1.905) 2(-2.875,0.635) 3(-2.875,-0.635) 4(-2.875,-1.905) 5(2.875,-1.905) 6(2.875,-0.635) 7(2.875,0.635) 8(2.875,1.905)
  rect 2.13x3 smd: 7(0,0)
  silkscreen extent -3,-2.5 0.9,2.83, body extent -2,-2.5 2,2.5, height 1.7
UX60SC-MB-5ST [mm] "USB Mini-B Recepticle"
  rect 0.5x2 smd: 1(-1.6,0) 2(-0.8,0) 3(0,0) 4(0.8,0) 5(1.6,0)
  rect 2.5x3.8 smd: SHD(-4.2,-2.5) SHD(4.2,-2.5)
  silkscreen extent -4.62,-5.63 4.62,0.13, body extent -4.9,-6.61 4.9,0.39, height 3.95

## Part data
BAT1 RAIL1: "Two large gauge leads soldered directly to the board."
BTEMP: library part MOLEX-HDR-1x3-SHERLOCK_RA, "Header, Molex, 2mm Pitch Sherlock Header, Single Row, Right Angle 3 Circuits, Length 3.3mm"
BUZZER: library part MOLEX-HDR-1x2-SHERLOCK_RA, "Header, Molex, 2mm Pitch Sherlock Header, Single Row, Horizontal, 2 Circuits, Length 3.3mm,  0353630260"
D1 D2 D3 D4 D5 D6: "1.0A Surface Mount Schottky Barrier Rectifier"
EXTLED SBUS1 SBUS2: "Header, Molex, 2mm Pitch Sherlock Header, Single Row, Horizontal, 4 Circuits, Length 3.3mm"
FAN: library part MOLEX-HDR-1x2-SHERLOCK_VERT, "Header, Molex, 2mm Pitch Sherlock Header, Single Row, Vertical, 2 Circuits, Length 3.3mm, 0353620250"
FB1 FB2: "Ferrite Bead"
HALL: "Header, Molex, 2mm Pitch Sherlock Header, Single Row, Vertical, 4 Circuits, Length 3.3mm, 0353620450"
P1: library part SWD_STM32, "SWD connector matching the pinout on STM Discovery Boards"
Q1 Q3 Q4 Q5 Q6 Q8 Q9 Q10 Q11 Q14 Q15 Q16 Q17 Q18 Q19 Q20 Q21 Q27 Q28 Q29 Q35 Q37: "60V P-Channel Logic Level PowerTrench MOSFET"
Q2 Q13 Q22 Q30 Q36: "60V N-Channel PowerTrench MOSFET"
Q7 Q12: "Quad NPN General Purpose Amplifier"
Q23 Q24 Q25 Q26 Q31 Q32 Q33 Q34: library part IRFx3306PbF, "HEXFET Power MOSFET"
TERM1: "Single Jumper on 1x2 Male Header"
U1 U16: "Current Sensor with Integrated Overcurrent Detection"
U2: "Dual 4-Channel Analog Multiplexers/Demultiplexers"
U3 U4: "IC DVR HIGH/LOW SIDE 3A 8SOPWR"
U5: library part MCP970x, "Low-Power Linear Active Thermistor ICs"
U6: "3.3V RS485 Transceiver"
U7: "Digital Pressure Sensor"
U8: "Mainstream Performance line, ARM Cortex-M3 MCU"
U9: "USB To Basic UART IC"
U10: library part 636L3C, "HCMOS/TTL Clock Oscillator"
U11: "Minimum Parts High- or Low-Side MOSFET Driver"
U12: library part LM5050, "High-Side OR-ing FET Controller"
U13: "55V, 1.2A Step-Down Regulator with 2.8uA Quiescent Current"
U14: "250 mA, 16V, Low Quiescent Current LDO Regulator"
U15: library part L78LxxAx, "Positive Voltage Regulator"
USB: "USB Mini B Metal Shield SMT"

## Free pads (board coordinates)
  round 215 hole 128.5: ""(150,150)
  round 215 hole 125: ""(150,2350) ""(5095,2350) ""(5100,150)

## Via types
v1: diameter 29, hole 15, Top Layer to Bottom Layer, tented both sides, 222 vias
v2: diameter 29, hole 15, Top Layer to Bottom Layer, 5 vias

## Nets (pads, with @x,y where several pads share a name; then routed paths per layer and width w, separated by ;. In a path a pad name is that pad's centre, name@x,y a point inside that pad or via, vN(x,y) a via of type N, cw(c..) or ccw(c..) an arc to the next point about the centre after c; other vN are vias at no path point)
3V3: BTEMP.1 C2.1 C21.2 C23.2 C24.2 C25.1 C31.1 C32.1 C33.1 C34.1 C35.1 C36.1 C39.1 C45.1 FB2.2 GP1.A GP2.A P1.1 Q27.S Q37.S R62.1 R64.1 R65.1 R67.1 R68.1 R69.1 R70.1 R74.1 R75.1 R76.1 R77.1 R81.1 R96.1 U2.16 U5.1 U6.8 U7.2 U7.3 U8.1 U8.19 U8.32 U8.48 U8.64 U10.4 U14.3 | length 3056
  Top Layer w10: BTEMP.1@2595,335 2735,475 R70.1@2768.5,475 ; v1(2740,770) C25.1@2740,823.5 2769.41,852.91 U7.3@2800.94,852.91 U7.2@2800.94,910 ; v1(2940,565) 2956.5,548.5 R69.1@2956.5,475 ; v1(3035,670) 3035,655.96 3067.69,623.27 U8.19@3110.51,623.27 ; v1(3110,330) 3110.51,330.51 U8.32@3110.51,367.36 ; v1@3285,1020 3285,966.5 FB2.2@3286.5,965 ; U8.48@3477.64,295.51 3514.49,295.51 v1(3515,295) ; U8.1@3477.64,734.49 3532.99,734.49 C39.1@3548.5,750 ; U8.64@3549.49,662.64 3549.49,699.49 v1(3550,700) 3548.5,701.5 C39.1@3548.5,750 ; C39.1@3555,756.5 C39.1@3548.5,750 ; U10.4@3555,856.69 3596.69,856.69 ; C36.1@3633.5,845 3621.81,856.69 3596.69,856.69 ; v1(3635,895) 3596.69,856.69 ; v1(3775,40) GP2.A@3902.32,40 ; R64.1@4075,246.5 4075,300 v1(4115,340) 4155,300 R65.1@4155,246.5
  Bottom Layer w10: v1(910,1750) 905.08,1754.92 Q37.S@905.08,1807.6 969.09,1807.6 R96.1@975,1813.5 ; U2.16@1160,900.51 C2.1@1160,811.5 1196.5,775 v1(1225,775) ; Q27.S@2385.08,1002.6 2454.09,1002.6 R62.1@2455,1003.5 ; v1(2430,955) 2455,980 R62.1@2455,1003.5 ; R62.1@2455,1008.5 R62.1@2455,1003.5 ; BTEMP.1@2595,360 BTEMP.1@2595,335 2595,293.5 C21.2@2643.5,245 ; v1(2945,1870) 3013.5,1870 3027.6,1884.09 U5.1@3027.6,1815.43 ; C35.1@3008.5,735 3008.5,696.5 v1(3035,670) 3035,626.5 C34.1@3028.5,620 ; R81.1@3048.5,220 3108.5,280 C31.1@3111.5,280 3111.5,328.5 v1(3110,330) ; v1(3515,295) 3516.5,296.5 C32.1@3565,296.5 ; C33.1@3548.5,750 3548.5,701.5 v1(3550,700) ; v1(4315,570) 4316.5,568.5 R74.1@4365,568.5 ; v1(4460,770) 4495,735 4495,730 4496.5,728.5 R76.1@4496.5,720 R75.1@4558.5,720 ; R68.1@4548.5,850 4598.5,800 v1(4605,800) ; U6.8@4739.49,915 4736.5,912.01 C24.2@4736.5,850 4730,843.5 v1(4730,745) 4730,731.5 R77.1@4766.5,695 ; v1(5075,1165) 5075,1106.5 R67.1@5076.5,1105
  other v1: 3285,1015
  other v2: 1650,1700 1650,1745 1650,1790 1675,1825 1700,1860
5V: C44.1 C46.2 L2.2 Q28.S Q29.S R61.1 R89.1 U13.1 U14.2 | length 5213.5
  Top Layer w10: v1(1780,1680) 1785,1685 v1(2145,1685) 2145,1470 2430,1185 v1(2430,1150)
  Top Layer w20: v1(1810,2000) 2121.82,2000 2473.82,2352 4057,2352 4154,2255 v1(4155,2255)
  Bottom Layer w10: C46.2@2091.5,1755 2145,1701.5 v1(2145,1685) 2145,1678.5 R89.1@2095,1628.5 ; v1(2430,1150) 2433.82,1150 2486.22,1097.6 Q29.S@2880.08,1097.6 ; R61.1@4675,1521.5 4680.91,1527.4 Q28.S@4744.92,1527.4
  Bottom Layer w20: v1(4155,2255) 4675,1735 R61.1@4675,1521.5
15V: C15.1 C16.1 C48.1 D3.A U3.1 U4.1 U15.1 | length 2959.5
  Top Layer w20: v1(2740,1965) 2780,1925 v1(2945,1925) ; v1(4215,1580) 4215,1600 4025,1790 4025,1959.55 4165.45,2100 v1(4385,2100)
  Bottom Layer w10: C16.1@2670,1886.5 2736.69,1886.5 U4.1@2740,1883.19 ; C48.1@3689.06,1807.44 3689.35,1810.22 C48.1@3690,1816.5 ; U3.1@4215,1656.81 4276.69,1656.81 C15.1@4280,1653.5
  Bottom Layer w20: U4.1@2740,1883.19 v1(2740,1965) ; v1(2945,1925) 3025,1925 3140,2040 3480.7,2040 3595.1,2154.4 3640.17,2154.4 3689.57,2105 3689.57,1879.65 U15.1@3689.06,1879.13 C48.1@3689.06,1807.44 ; C48.1@3690,1806.5 C48.1@3691.5,1806.5 ; C48.1@3691.5,1810 v1(4020,1810) ; v1(4215,1580) U3.1@4215,1656.81 ; v1(4385,2100) 4432.01,2100 D3.A@4447.01,2085
15V_EN: Q36.G R93.1 U8.8 | length 1387
  Top Layer w10: U8.8@3339.84,734.49 3339.84,805.8 3350,815.96 3350,1040 3490,1180 3490,1440 v1(3500,1450)
  Bottom Layer w10: R93.1@3352.6,1994.09 Q36.G@3352.6,1930.08 3352.6,1597.4 v1(3500,1450)
BAL1: R10.1 U8.40 | length 995.1
  Top Layer w10: R10.1@2426.5,155 2427.5,154 3251.12,154 3320.16,223.03 U8.40@3320.16,295.51
BAL2: R11.1 U8.39 | length 1010.6
  Top Layer w10: R11.1@2426.5,280 2530.5,176 2530.92,176 2535.92,171 3244.08,171 3300.47,227.39 U8.39@3300.47,295.51
BAL3: R12.1 U8.38 | length 1090
  Top Layer w10: R12.1@2426.5,410 2463,373.5 2463,267.96 2542.96,188 3237.04,188 3280.79,231.75 U8.38@3280.79,295.51
BAL4: R13.1 U8.37 | length 1164.6
  Top Layer w10: R13.1@2426.5,535 2480,481.5 2480,275 2550,205 3230,205 3261.1,236.1 U8.37@3261.1,295.51
BAL5: R30.1 U8.58 | length 2319.7
  Top Layer w10: R30.1@1510,836.5 1565.32,836.5 1625,896.18 v1(1625,900) ; v1(3475,515) 3504.53,544.53 U8.58@3549.49,544.53
  Bottom Layer w10: v1(1625,900) 1648,877 1851.08,877 2309.58,418.5 3378.5,418.5 v1(3475,515)
BAL6: R31.1 U8.59 | length 2277.9
  Top Layer w10: R31.1@1571.5,900 1571.5,906.5 v1(1625,960) ; v1(3475,565) 3475.79,564.21 U8.59@3549.49,564.21
  Bottom Layer w10: v1(1625,960) 1691,894 1858.12,894 2316.62,435.5 3345.5,435.5 v1(3475,565)
BAL7: R32.1 U8.61 | length 2283
  Top Layer w10: R32.1@1571.5,1025 v1(1625,1025) ; v1(3475,610) 3481.42,603.58 U8.61@3549.49,603.58
  Bottom Layer w10: v1(1625,1025) 1739,911 1865.17,911 2323.67,452.5 3317.5,452.5 v1(3475,610)
BAL8: R33.1 U8.62 | length 2349.8
  Top Layer w10: R33.1@1571.5,1150 v1(1625,1150) ; v1(3475,655) 3506.73,623.27 U8.62@3549.49,623.27
  Bottom Layer w10: v1(1625,1150) 1847,928 1872.21,928 2330.71,469.5 3289.5,469.5 v1(3475,655)
BAT+: C14.1 C40.2 D1.C D6.A Q1.S Q24.D Q31.D Q32.D R1.1 U1.5 U1.6 U1.7 U1.8 U11.1 | length 4303.8
  Top Layer w10: Q32.D@1085,2120 1037.57,2072.57 1037.57,2000.35 1101.42,1936.5 1185,1936.5 U11.1@1185,2025.51
  Bottom Layer w10: R1.1@2315,2237.4 Q1.S@2384.92,2237.4 2384.92,2369.21
  Bottom Layer w80: 977.11,2120 Q32.D@1085,2120 ; Q31.D@1435,2120 1542.89,2120 ; 2924.33,2120 Q24.D@3030,2120 3302.36,2120 C14.1@3322.36,2100
  Bottom Layer w200: 495,2374.13 935,2374.13 ; 977.11,2120 935,2162.11 935,2374.13 ; 1542.89,2120 1585,2162.11 1585,2374.13 ; 2924.33,2120 2670.19,2374.13 935,2374.13
BAT_CVH: U2.3 U8.26 | length 2577
  Top Layer w10: v1(1245,1005) 1245,1109.04 1379.96,1244 1420.18,1244 1420.34,1244.17 1620.83,1244.17 1705,1160 v1(1705,1150) ; U8.26@3110.51,485.47 3145.47,485.47 v1(3175,515)
  Bottom Layer w10: v1(1245,1005) 1260,1020 U2.3@1260,1089.49 ; v1(1705,1150) 1705,1146.92 1725.42,1126.5 1725.98,1126.5 1741.5,1110.98 1741.5,1110.42 2348.42,503.5 3163.5,503.5 v1(3175,515)
BAT_CVL: U2.13 U8.27 | length 2681.9
  Top Layer w10: v1(1300,830) 1300,823.1 1382.26,740.83 1534.66,740.83 1715,921.18 v1(1715,1100) ; U8.27@3110.51,465.79 3185.79,465.79 v1(3220,500)
  Bottom Layer w10: v1(1300,830) 1310,840 U2.13@1310,900.51 ; v1(1715,1100) 1715,1084.04 1854.04,945 1879.25,945 2337.75,486.5 3206.5,486.5 v1(3220,500)
BAT_CVSELA: U2.10 U8.43 | length 2228.9
  Top Layer w10: v1(3375,370) 3379.21,365.79 U8.43@3379.21,295.51
  Bottom Layer w10: U2.10@1460,900.51 1460,870 1488,842 1838,842 2295.5,384.5 3360.5,384.5 v1(3375,370)
BAT_CVSELB: U2.9 U8.44 | length 2229.6
  Top Layer w10: U8.44@3398.9,295.51 3398.9,333.9 3415,350 v1(3415,390)
  Bottom Layer w10: U2.9@1510,900.51 1510,880 1530,860 1844.04,860 2302.54,401.5 3403.5,401.5 v1(3415,390)
BAT_I: U1.12 U8.24 | length 3594.9
  Top Layer w10: v1(635,2125) 635,1554.04 910.88,1278.17 1638.35,1278.17 1758.5,1158.02 1758.5,1085.08 2180.41,663.17 2905.88,663.17 3044.2,524.84 U8.24@3110.51,524.84
  Bottom Layer w10: v1(635,2125) 635,2115.36 U1.12@684.34,2066.01
BAT_SENS_EN: Q2.G Q13.G Q22.G R5.1 U8.45 | length 6046.9
  Top Layer w10: Q22.G@67.6,584.92 402.52,250 1090,250 1315,25 1883.28,25 1905.88,47.6 Q13.G@2100.08,47.6 ; v1(2355,615) 2340.83,629.17 2230.12,629.17 2123.5,522.54 2123.5,195.98 2073.12,145.59 2073.12,74.56 Q13.G@2100.08,47.6 ; v1(2465,725) 2465,1835 v1(2605,1975) ; U8.45@3418.58,295.51 3418.58,203.58 3352,137 2525.5,137 2442,53.5 R5.1@2170,53.5 2164.09,47.6 Q13.G@2100.08,47.6
  Bottom Layer w10: v1(2355,615) v1(2465,725) ; Q2.G@2602.4,2019.92 2602.4,1977.6 v1(2605,1975)
BAT_V: C4.1 R3.2 R4.1 U8.21 | length 2316.5
  Top Layer w10: v1(2670,2065) 2670,2000 2483,1813 2483,752.96 2521.79,714.17 2927,714.17 3057.27,583.9 U8.21@3110.51,583.9
  Bottom Layer w10: R3.2@2540,2236.5 2547.01,2236.5 R4.1@2610,2173.5 C4.1@2670,2113.5 v1(2670,2065)
BOOST_H: U4.5 U8.41 | length 1636.2
  Top Layer w10: v1(2890,1585) 2850,1545 2850,1250 3055,1045 v1(3055,925) ; U8.41@3339.84,295.51 3339.84,343.64 3330,353.48 3330,397.55 3358,425.55 3358,552 v1(3340,570)
  Bottom Layer w10: v1(2890,1585) U4.5@2890,1656.81 ; v1(3055,925) 3055,910.89 3185,780.89 3185,670 3285,570 v1(3340,570)
BOOST_L: U4.6 U8.34 | length 1574.5
  Top Layer w10: v1(2840,1585) 2830,1575 2830,1245.96 3010,1065.96 v1(3010,925) ; v1(3190,625) 3263.5,551.5 3263.5,402.54 3202.05,341.09 U8.34@3202.05,295.51
  Bottom Layer w10: v1(2840,1585) U4.6@2840,1656.81 ; v1(3010,925) 3016.85,925 3168,773.85 3168,647 v1(3190,625)
BOOT0: R83.1 U8.60 | length 155.5
  Top Layer w10: U8.60@3549.49,583.9 3588.9,583.9 3665,660 R83.1@3665,668.5
BUCK_H: U3.5 U8.42 | length 2440.2
  Top Layer w10: U8.42@3359.53,295.51 3359.53,348 3348.5,359.02 3348.5,392 3375,418.5 v1(3375,595) ; v1(3820,810) 3820,832.48 3914.02,926.5 3944.38,926.5 4258.5,1240.62 4258.5,1848.98 4125.98,1981.5 4091.5,1981.5 v1(4065,1955)
  Bottom Layer w10: v1(3375,595) 3375,631.85 3528.15,785 3795,785 v1(3820,810) ; U3.5@4065,1883.19 v1(4065,1955)
BUCK_L: U3.6 U8.35 | length 2354.1
  Top Layer w10: U8.35@3221.73,295.51 3221.73,336.73 3280.5,395.5 3280.5,565.5 v1(3345,630) ; v1(3785,840) 3803.48,840 3906.98,943.5 3937.33,943.5 4241.5,1247.67 4241.5,1828.5 v1(4115,1955)
  Bottom Layer w10: v1@3357.05,637.95 3521.11,802 3747,802 v1(3785,840) ; U3.6@4115,1883.19 v1(4115,1955)
BUZZER: Q30.G R66.1 U8.55 | length 2166.4
  Top Layer w10: U8.55@3549.49,485.47 3695.47,485.47 3950,740 3950,795 v1(3980,825) ; v1(3925,900) 3941.92,900 4715,1673.08 v1(4715,1895)
  Bottom Layer w10: v1@3920,895 3930,895 3980,845 v1(3980,825) ; R66.1@4640,1953.5 4645.91,1947.6 Q30.G@4714.92,1947.6 4714.92,1894.92 v1(4715,1895)
C1: BAL1.8 Q3.S Q14.S R6.1 R15.2 | length 1548
  Top Layer w20: BAL1.8@1068.98,370 BAL1.8@1073.98,375 ; BAL1.8@1078.98,370 1128.5,419.53 1320,419.53 1439.53,300 1830.91,300 R15.2@1850.91,280
  Bottom Layer w10: Q3.S@1495.08,47.6 1559.09,47.6 R6.1@1565,53.5 ; Q14.S@1790.08,277.6 R15.2@1848.5,277.6
  Bottom Layer w20: BAL1.8@1068.98,370 BAL1.8@1073.98,365 ; BAL1.8@1078.98,370 1128.5,320.47 1227.65,320.47 1495.08,53.05 Q3.S@1495.08,47.6
C2: BAL1.7 Q4.S Q15.S R7.1 R16.2 | length 1703
  Top Layer w20: BAL1.7@970.55,370 BAL1.7@975.55,375 ; BAL1.7@980.55,370 1060.12,449.57 1243.62,449.57 1318.58,524.53 1359.61,524.53 1384.14,500 1825.91,500 R16.2@1850.91,475
  Bottom Layer w10: Q4.S@1495.08,242.6 R7.1@1559.09,242.6 ; Q15.S@1790.08,472.6 R16.2@1848.5,472.6
  Bottom Layer w20: BAL1.7@970.55,370 BAL1.7@975.55,375 ; BAL1.7@980.55,370 1030.12,419.57 1282.06,419.57 1306.15,395.47 1347.65,395.47 1495.08,248.05 Q4.S@1495.08,242.6
C3: BAL1.6 Q5.S Q16.S R8.1 R17.2 | length 1919.6
  Top Layer w20: BAL1.6@872.13,370 BAL1.6@877.13,375 ; BAL1.6@882.13,370 991.69,479.57 1218.7,479.57 1434.14,695 1825.91,695 R17.2@1850.91,670
  Bottom Layer w10: Q5.S@1495.08,437.6 1559.09,437.6 R8.1@1565,443.5 ; Q16.S@1790.08,667.6 R17.2@1848.5,667.6
  Bottom Layer w20: BAL1.6@872.13,370 BAL1.6@877.13,375 ; BAL1.6@882.13,370 961.69,449.57 1294.48,449.57 1318.58,425.47 1425.57,425.47 1437.69,437.6 Q5.S@1495.08,437.6
C4: BAL1.5 Q6.S Q17.S R9.1 R34.2 R42.1 | length 1828.3
  Top Layer w20: BAL1.5@773.7,360 BAL1.5@783.7,370 1000,586.3 1000,847.37 1000.5,847.87 1000.5,1021.41 R34.2@1020,1040.91
  Bottom Layer w10: R42.1@773.5,280 773.7,280.2 BAL1.5@773.7,370 ; R34.2@1020,1040.91 1022.4,1038.5 Q17.S@1022.4,980.08 ; Q6.S@1495.08,632.6 R9.1@1559.09,632.6
  Bottom Layer w20: BAL1.5@773.7,370 779.3,370 BAL1.5@781.5,372.2 ; BAL1.5@783.7,370 893.27,479.57 1274.57,479.57 1289.57,494.57 1289.57,495.51 1426.65,632.6 Q6.S@1495.08,632.6
C5: BAL1.4 Q8.S Q18.S R22.1 R35.2 | length 1387.7
  Top Layer w20: BAL1.4@675.28,360 BAL1.4@675.28,370 ; BAL1.4@685.28,370 685.28,460.17 800,574.89 800,1020.91 R35.2@820,1040.91
  Bottom Layer w10: R35.2@820,1040.91 822.4,1038.5 Q18.S@822.4,980.08 ; R22.1@1051.5,755 1057.4,749.09 Q8.S@1057.4,685.08
  Bottom Layer w20: BAL1.4@675.28,360 BAL1.4@685.28,370 794.84,479.57 846.44,479.57 1051.95,685.08 Q8.S@1057.4,685.08
C6: BAL1.3 Q9.S Q19.S R23.1 R36.2 | length 1261.9
  Top Layer w20: BAL1.3@586.85,370 573.47,383.38 573.47,548.37 600,574.89 600,1020.91 R36.2@620,1040.91
  Bottom Layer w10: R36.2@620,1040.91 622.4,1038.5 Q19.S@622.4,980.08 ; Q9.S@857.4,685.08 R23.1@857.4,749.09
  Bottom Layer w20: BAL1.3@576.85,360 BAL1.3@576.85,370 ; BAL1.3@586.85,370 586.85,419.98 851.95,685.08 Q9.S@857.4,685.08
C7: BAL1.2 Q10.S Q20.S R24.1 R37.2 | length 1249.9
  Top Layer w20: R37.2@420,1040.91 400,1020.91 400,620 488.43,531.57 BAL1.2@488.43,370 ; BAL1.2@478.43,360 BAL1.2@478.43,370
  Bottom Layer w10: R37.2@420,1040.91 422.4,1038.5 Q20.S@422.4,980.08 ; Q10.S@657.4,685.08 R24.1@657.4,749.09
  Bottom Layer w20: BAL1.2@478.43,360 BAL1.2@478.43,370 ; BAL1.2@488.43,370 488.43,521.55 651.95,685.08 Q10.S@657.4,685.08